# EAGLE board MCPGrundplatte (EAGLE 9.6.2)
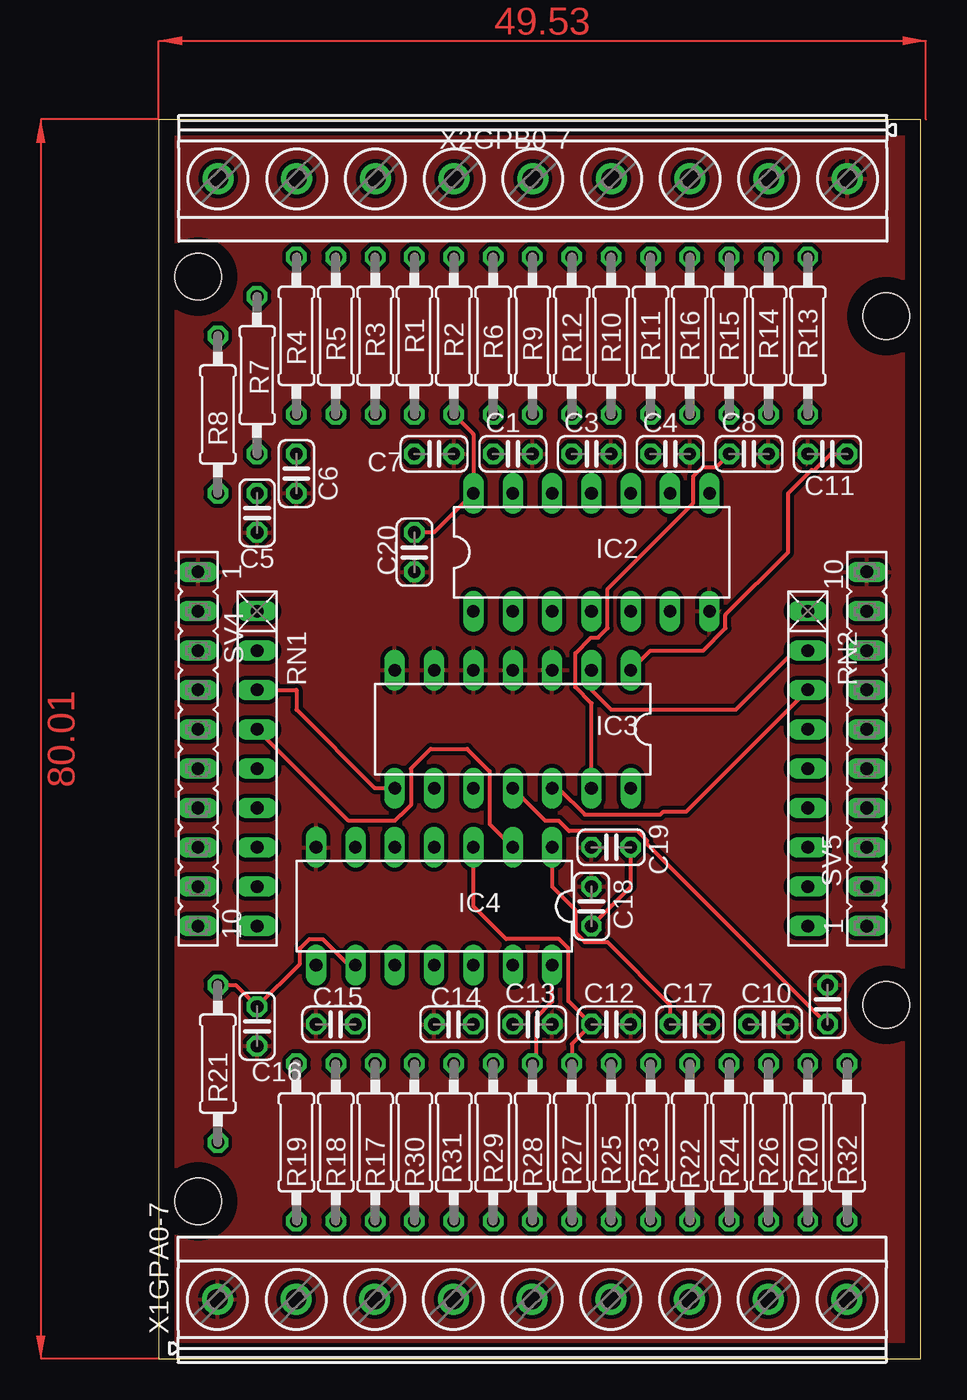
[diagram p0: board, top side]
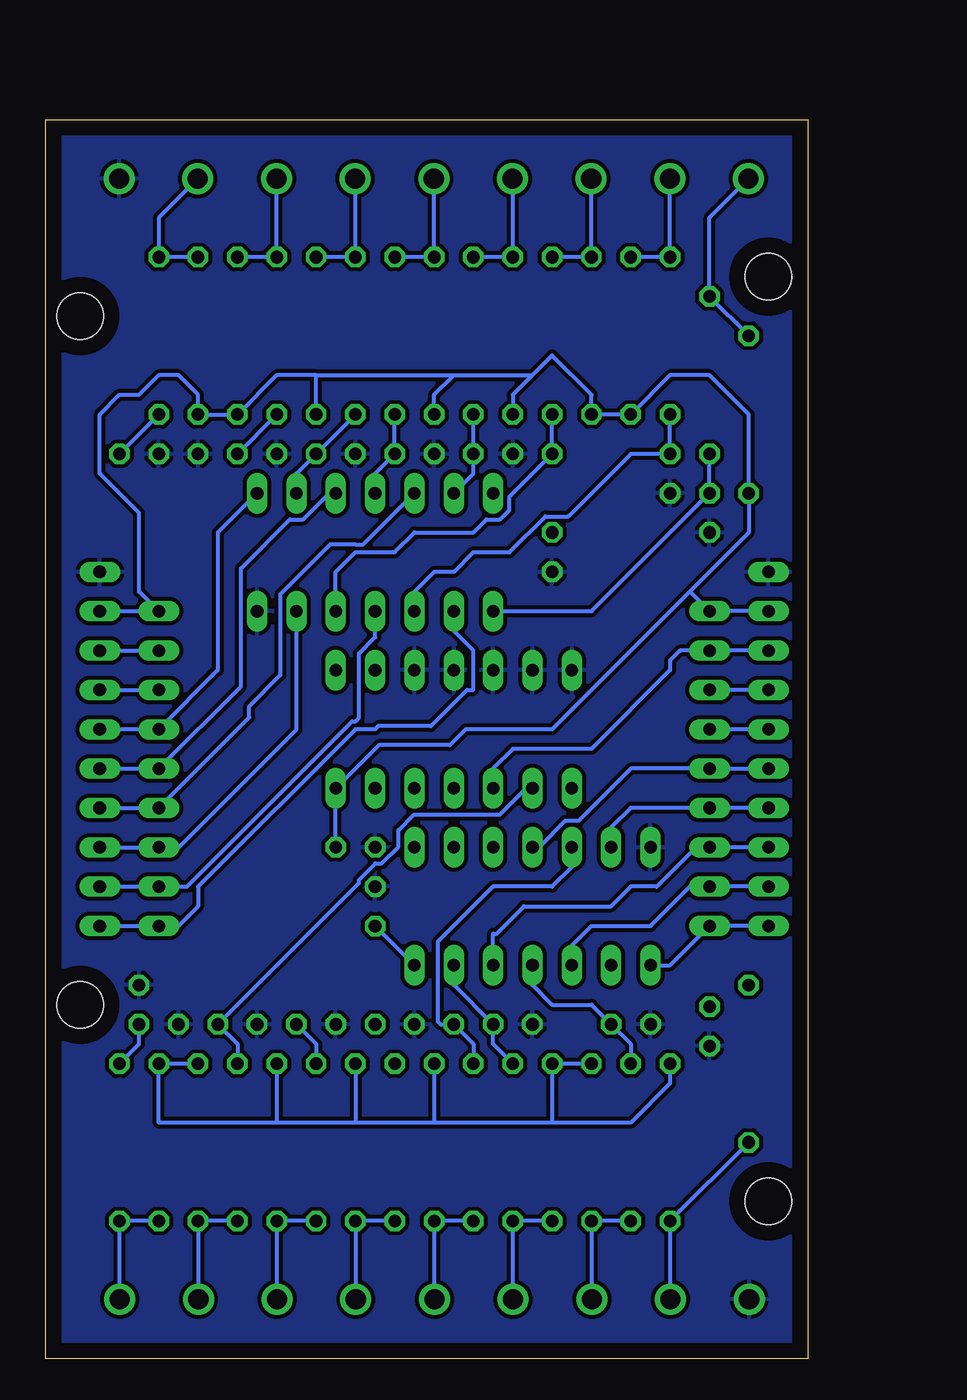
[diagram p1: board, bottom side, seen from below]

Size 49.2 x 80 mm. Coordinates in mm from the lower left corner, seen from the top.
Outline: 0,0 49.2,0 49.2,80 0,80 0,0
Copper layers (1*16): Top 0.035mm / dielectric 1.5mm / Bottom 0.035mm
Design rules "platinenbelichter": minimum track width 10mil, minimum drill 24mil, track to track 10mil, track to pad 10mil, pad to pad 10mil, via to via 10mil, smd to smd 10mil, copper to edge 40mil, drill to drill 8mil, minimum pad ring 10mil, minimum via ring 8mil, stop-mask expansion 10mil, vias tented up to drill 0mil, thermal gap 10mil
Holes 3 mm at 2.54,69.85 46.99,22.86 2.54,10.16 46.99,67.31

## Footprints (pad centres in the part's own frame; a part is rotated, then mirrored left to right if it is on the bottom)
C025-024X044 = drill 0.813 octagon: 1 -1.27,0; 2 1.27,0
DIL14 = drill 0.813 long: 1 -7.62,-3.81; 2 -5.08,-3.81; 3 -2.54,-3.81; 4 0,-3.81; 5 2.54,-3.81; 6 5.08,-3.81; 7 7.62,-3.81; 8 7.62,3.81; 9 5.08,3.81; 10 2.54,3.81; 11 0,3.81; 12 -2.54,3.81; 13 -5.08,3.81; 14 -7.62,3.81
0207/10 = drill 0.813 octagon: 1 -5.08,0; 2 5.08,0
RN-9 = drill 0.813 long: 1 -10.16,0; 2 -7.62,0; 3 -5.08,0; 4 -2.54,0; 5 0,0; 6 2.54,0; 7 5.08,0; 8 7.62,0; 9 10.16,0
FE10 = drill 0.813 long: 1 -11.43,0; 2 -8.89,0; 3 -6.35,0; 4 -3.81,0; 5 -1.27,0; 6 1.27,0; 7 3.81,0; 8 6.35,0; 9 8.89,0; 10 11.43,0
MKDSN1,5/9-5,08 = drill 1.3 pad 2: 1 -20.341,0.025; 2 -15.261,0.025; 3 -10.181,0.025; 4 -5.101,0.025; 5 -0.021,0.025; 6 5.059,0.025; 7 10.139,0.025; 8 15.219,0.025; 9 20.299,0.025

## Placement (x,y rotation side)
C1  100Nf  [C025-024X044]  22.86,58.42 0 top
C3  100nF  [C025-024X044]  27.94,58.42 0 top
C4  100nF  [C025-024X044]  33.02,58.42 0 top
C5  100nF  [C025-024X044]  6.35,54.61 270 top
C6  100nF  [C025-024X044]  8.89,57.15 270 top
C7  100nF  [C025-024X044]  17.78,58.42 0 top
C8  100nF  [C025-024X044]  38.1,58.42 0 top
C10  100nF  [C025-024X044]  39.37,21.59 0 top
C11  100nF  [C025-024X044]  43.18,58.42 180 top
C12  100nF  [C025-024X044]  29.21,21.59 0 top
C13  100nF  [C025-024X044]  24.13,21.59 0 top
C14  100nF  [C025-024X044]  19.05,21.59 180 top
C15  100nF  [C025-024X044]  11.43,21.59 180 top
C16  100nF  [C025-024X044]  6.35,21.46 270 top
C17  100nF  [C025-024X044]  34.29,21.59 0 top
C18  100nF  [C025-024X044]  27.94,29.21 270 top
C19  100nF  [C025-024X044]  29.21,33.02 0 top
C20  100nF  [C025-024X044]  16.51,52.07 270 top
C21  100nF  [C025-024X044]  43.18,22.86 90 top
IC2  74HC14N  [DIL14]  27.94,52.07 0 top
IC3  74HC14N  [DIL14]  22.86,40.64 180 top
IC4  74HC14N  [DIL14]  17.78,29.21 180 top
R1  10k  [0207/10]  16.51,66.04 270 top
R2  10k  [0207/10]  19.05,66.04 90 top
R3  10k  [0207/10]  13.97,66.04 90 top
R4  10k  [0207/10]  8.89,66.04 270 top
R5  10k  [0207/10]  11.43,66.04 270 top
R6  10k  [0207/10]  21.59,66.04 270 top
R7  10k  [0207/10]  6.35,63.5 270 top
R8  10k  [0207/10]  3.81,60.96 90 top
R9  10k  [0207/10]  24.13,66.04 90 top
R10  10k  [0207/10]  29.21,66.04 270 top
R11  10k  [0207/10]  31.75,66.04 90 top
R12  10k  [0207/10]  26.67,66.04 270 top
R13  10k  [0207/10]  41.91,66.04 270 top
R14  10k  [0207/10]  39.37,66.04 90 top
R15  10k  [0207/10]  36.83,66.04 90 top
R16  10k  [0207/10]  34.29,66.04 270 top
R17  10k  [0207/10]  13.97,13.97 270 top
R18  10k  [0207/10]  11.43,13.97 90 top
R19  10k  [0207/10]  8.89,13.97 270 top
R20  10k  [0207/10]  41.91,13.97 270 top
R21  10k  [0207/10]  3.81,19.05 90 top
R22  10k  [0207/10]  34.29,13.97 270 top
R23  10k  [0207/10]  31.75,13.97 90 top
R24  10k  [0207/10]  36.83,13.97 90 top
R25  10k  [0207/10]  29.21,13.97 270 top
R26  10k  [0207/10]  39.37,13.97 270 top
R27  10k  [0207/10]  26.67,13.97 90 top
R28  10k  [0207/10]  24.13,13.97 270 top
R29  10k  [0207/10]  21.59,13.97 90 top
R30  10k  [0207/10]  16.51,13.97 270 top
R31  10k  [0207/10]  19.05,13.97 90 top
R32  10k  [0207/10]  44.45,13.97 90 top
RN1  100K  [RN-9]  6.35,38.1 270 top
RN2  100K  [RN-9]  41.91,38.1 270 top
SV4  [FE10]  2.54,39.37 270 top
SV5  [FE10]  45.72,39.37 90 top
X1GPA0-7  MKDSN1,5/9-5,08  [MKDSN1,5/9-5,08]  24.13,3.81 0 top
X2GPB0-7  MKDSN1,5/9-5,08  [MKDSN1,5/9-5,08]  24.13,76.2 180 top

## Library data of the parts
C1 C3-C8 C10-C21 = rcl; SPICEPREFIX: C
IC2-IC4 = 74xx-eu
R1-R32 = rcl; SPICEPREFIX: R
RN1 = resistor-net; OC_FARNELL: unknown; OC_NEWARK: unknown; SPICEPREFIX: X
RN2 = resistor-net; OC_FARNELL: unknown; OC_NEWARK: unknown
SV4 SV5 = con-lsta; OC_FARNELL: unknown; OC_NEWARK: unknown
X1GPA0-7 X2GPB0-7 = con-phoenix-508

## Nets
GND: C1.2 C3.2 C4.2 C5.2 C6.2 C7.2 C8.2 C10.2 C11.2 C12.2 C13.2 C14.2 C15.2 C16.2 C17.2 C18.1 C19.1 C20.2 C21.2 IC2.7 IC3.3 IC3.4 IC3.5 IC3.6 IC3.7 IC4.7 SV4.1 SV5.10 X1GPA0-7.1 X2GPB0-7.1
GPA0: R20.2 R32.1 X1GPA0-7.9
GPA0.: IC3.10 RN1.2 SV4.3
GPA1: R24.1 R26.2 X1GPA0-7.8
GPA1.: IC3.8 RN1.3 SV4.4
GPA2: R22.2 R23.1 X1GPA0-7.7
GPA2.: IC4.2 RN1.4 SV4.5
GPA3: R25.2 R27.1 X1GPA0-7.6
GPA3.: IC4.4 RN1.5 SV4.6
GPA4: R28.2 R29.1 X1GPA0-7.5
GPA4.: IC4.6 RN1.6 SV4.7
GPA5: R30.2 R31.1 X1GPA0-7.4
GPA5.: IC4.12 RN1.7 SV4.8
GPA6: R17.2 R18.1 X1GPA0-7.3
GPA6.: IC4.10 RN1.8 SV4.9
GPA7: R19.2 R21.1 X1GPA0-7.2
GPA7.: IC4.8 RN1.9 SV4.10
GPB0: R7.1 R8.2 X2GPB0-7.9
GPB0.: IC2.2 RN2.9 SV5.1
GPB1: R4.1 R5.1 X2GPB0-7.8
GPB1.: IC2.4 RN2.8 SV5.2
GPB2: R1.1 R3.2 X2GPB0-7.7
GPB2.: IC2.6 RN2.7 SV5.3
GPB3: R2.2 R6.1 X2GPB0-7.6
GPB3.: IC2.12 RN2.6 SV5.4
GPB4: R9.2 R12.1 X2GPB0-7.5
GPB4.: IC2.10 RN2.5 SV5.5
GPB5: R10.1 R11.2 X2GPB0-7.4
GPB5.: IC2.8 RN2.4 SV5.6
GPB6: R15.2 R16.1 X2GPB0-7.3
GPB6.: IC3.12 RN2.3 SV5.7
GPB7: R13.1 R14.2 X2GPB0-7.2
GPB7.: IC3.2 RN2.2 SV5.8
N$2: C7.1 IC2.5 R1.2
N$4: C1.1 IC2.13 R6.2
N$5: C6.1 IC2.3 R4.2
N$6: C5.1 IC2.1 R7.2
N$7: C4.1 IC2.9 R10.2
N$8: C3.1 IC2.11 R12.2
N$9: C8.1 IC3.13 R16.2
N$10: C10.1 IC3.9 R24.2
N$11: C11.1 IC3.1 R13.2
N$12: C12.1 IC4.3 R27.2
N$13: C13.1 IC4.5 R29.2
N$16: C15.1 IC4.11 R18.2
N$20: C16.1 IC4.9 R21.2
N$21: C17.1 IC4.1 R23.2
N$28: C14.1 IC4.13 R31.2
N$52: C21.1 IC3.11 R32.2
VDD: C18.2 C19.2 C20.1 IC2.14 IC3.14 IC4.14 R2.1 R3.1 R5.2 R8.1 R9.1 R11.1 R14.1 R15.1 R17.1 R19.1 R20.1 R22.1 R25.1 R26.1 R28.1 R30.1 RN1.1 RN2.1 SV4.2 SV5.9

## Tracks (layer width: path | path; a pad name or v marks a point on that pad's centre or on a via)
GND
  pour Bottom: 0,80.01 49.53,80.01 49.53,0 0,0
  pour Top: 0,80.01 49.53,80.01 49.53,0 0,0
GPA0
  Bottom 0.254: R20.2 R32.1 44.45,3.86 X1GPA0-7.9
GPA0.
  Bottom 0.254: IC3.10 20.32,38.1 19.05,39.37 13.97,39.37 8.89,44.45 8.89,45.09 8.26,45.72 RN1.2 SV4.3
GPA1
  Bottom 0.254: R24.1 R26.2 39.37,3.86 X1GPA0-7.8
GPA1.
  Top 0.254: IC3.8 13.97,36.83 8.89,41.91 8.89,43.18 RN1.3
  Bottom 0.254: SV4.4 RN1.3
GPA2
  Bottom 0.254: R23.1 R22.2 34.29,3.86 X1GPA0-7.7
GPA2.
  Top 0.254: RN1.4 12.27,34.72 15.24,34.72 15.65,35.13 15.67,35.13 16.28,35.74 16.28,38.1 17.55,39.37 19.91,39.37 21.36,37.92 21.36,34.52 IC4.2
  Bottom 0.254: SV4.5 RN1.4
GPA3
  Bottom 0.254: R27.1 R25.2 29.21,3.86 X1GPA0-7.6
GPA3.
  Bottom 0.254: IC4.4 17.37,33.02 15.67,34.72 14.81,34.72 11.43,38.1 RN1.5 SV4.6
GPA4
  Bottom 0.254: R29.1 R28.2 24.13,3.86 X1GPA0-7.5
GPA4.
  Bottom 0.254: SV4.7 RN1.6 11.43,35.56 12.7,34.29 IC4.6
GPA5
  Bottom 0.254: X1GPA0-7.4 19.03,8.87 | R30.2 19.01,8.89 19.03,8.87 | R31.1 19.03,8.89 19.03,8.87
GPA5.
  Bottom 0.254: IC4.12 20.32,27.43 20.11,27.43 18.33,29.21 12.7,29.21 11.43,30.48 9.75,30.48 7.21,33.02 RN1.7 SV4.8
GPA6
  Bottom 0.254: R18.1 R17.2 13.97,3.86 X1GPA0-7.3
GPA6.
  Bottom 0.254: SV4.9 RN1.8 7.62,30.48 10.16,27.94 13.97,27.94 15.24,26.67 IC4.10
GPA7
  Bottom 0.254: R21.1 R19.2 8.89,3.86 X1GPA0-7.2
GPA7.
  Bottom 0.254: IC4.8 8.89,25.4 RN1.9 SV4.10
GPB0
  Bottom 0.254: X2GPB0-7.9 6.35,73.66 R7.1 R8.2
GPB0.
  Bottom 0.254: SV5.1 RN2.9 40.64,27.94 39.37,29.21 39.37,30.48 29.21,40.64 27.94,40.64 27.74,40.84 24.33,40.84 22,43.18 21.59,43.18 21.59,45.72 22.86,46.99 IC2.2
GPB1
  Bottom 0.254: X2GPB0-7.8 8.89,76.15 R4.1 R5.1
GPB1.
  Bottom 0.254: SV5.2 RN2.8 40.09,30.48 29.42,41.15 29.21,41.15 28.98,41.38 28.98,45.54 27.94,46.58 IC2.4
GPB2
  Bottom 0.254: X2GPB0-7.7 13.97,76.15 R3.2 R1.1
GPB2.
  Bottom 0.254: SV5.3 RN2.7 40.64,33.02 33.02,40.64 IC2.6
GPB3
  Bottom 0.254: X2GPB0-7.6 19.05,76.15 R2.2 R6.1
GPB3.
  Bottom 0.254: SV5.4 RN2.6 36.07,41.4 36.07,42.12 34.06,44.13 34.06,49.35 30.84,52.58 29.21,52.58 28.7,52.58 IC2.12
GPB4
  Bottom 0.254: X2GPB0-7.5 24.13,76.15 R9.2 R12.1
GPB4.
  Bottom 0.254: SV5.5 RN2.5 36.6,43.41 36.6,51.03 33.45,54.18 32.59,54.18 30.89,55.88 IC2.10
GPB5
  Bottom 0.254: R11.2 R10.1 29.21,76.15 X2GPB0-7.4
GPB5.
  Bottom 0.254: IC2.8 38.1,53.34 38.1,44.45 RN2.4 SV5.6
GPB6
  Bottom 0.254: R15.2 R16.1 34.29,76.15 X2GPB0-7.3
GPB6.
  Top 0.254: IC3.12 25.81,36.83 27.51,35.13 32.38,35.13 32.59,35.33 34.06,35.33 RN2.3
  Bottom 0.254: SV5.7 RN2.3
GPB7
  Bottom 0.254: R14.2 R13.1 41.91,73.66 X2GPB0-7.2
GPB7.
  Top 0.254: RN2.2 41.07,45.72 37.26,41.91 29.21,41.91 27.94,43.18 IC3.2
  Bottom 0.254: SV5.8 RN2.2
N$2
  Bottom 0.254: IC2.5 30.48,50.8 29.21,52.07 26.67,52.07 25.4,53.34 21.59,53.34 20.75,54.18 19.89,54.18 19.28,54.79 19.28,55.65 C7.1 R1.2
N$4
  Bottom 0.254: IC2.13 21.59,57.15 C1.1 R6.2
N$5
  Bottom 0.254: IC2.3 25.4,49.53 24.13,50.8 22.86,50.8 21.59,52.07 19.25,52.07 16.94,54.38 15.47,54.38 11.43,58.42 C6.1 R4.2
N$6
  Bottom 0.254: IC2.1 15.24,48.26 15.04,48.26 13.97,48.26 C5.1 R7.2
N$7
  Bottom 0.254: R10.2 C4.1 33.02,57.15 IC2.9
N$8
  Bottom 0.254: R12.2 C3.1 27.94,57.15 IC2.11
N$9
  Top 0.254: C8.1 35.99,57.58 35.13,57.58 34.52,56.97 34.52,55.24 28.98,49.71 28.98,47.17 28.37,46.56 27.91,46.56 26.9,45.54 26.9,43.36 27.94,42.32 IC3.13
  Bottom 0.254: C8.1 R16.2
N$10
  Bottom 0.254: R24.2 36.83,20.32 C10.1 28.98,30.71 28.98,30.91 27.91,31.98 27.51,31.98 26.44,33.05 26.44,34.11 25.43,35.13 19.89,35.13 18.19,36.83 IC3.9
N$11
  Top 0.254: IC3.1 31.75,45.72 35.15,45.72 36.6,47.17 36.6,48.03 40.64,52.07 40.64,55.88 42.14,57.38 42.34,57.38 43.38,58.42 C11.1
  Bottom 0.254: C11.1 R13.2
N$12
  Top 0.254: IC4.3 20.32,29.21 22.43,27.1 25.83,27.1 26.44,26.49 26.44,23.09 C12.1 26.67,20.32 R27.2
N$13
  Bottom 0.254: R29.2 21.59,20.32 C13.1 23.72,21.59 23.9,21.77 23.9,26.9 20.32,30.48 16.51,30.48 15.24,31.75 IC4.5
N$16
  Bottom 0.254: R18.2 11.43,20.32 C15.1 13.97,22.86 16.51,22.86 17.78,24.13 IC4.11
N$20
  Top 0.254: R21.2 4.95,24.13 C16.1 9.12,25.5 9.12,26.49 9.73,27.1 10.59,27.1 12.29,25.4 IC4.9
N$21
  Top 0.254: IC4.1 25.4,30.48 26.9,28.98 26.9,27.51 27.51,26.9 28.98,26.9 33.02,22.86 C17.1
  Bottom 0.254: R23.2 31.75,20.32 C17.1
N$28
  Bottom 0.254: R31.2 20.32,20.32 C14.1 22.86,24.13 IC4.13
N$52
  Top 0.254: C21.1 31.52,33.25 31.52,33.45 30.91,34.06 26.49,34.06 25.83,34.72 24.97,34.72 IC3.11
  Bottom 0.254: R32.2 43.18,20.32 C21.1
VDD
  Top 0.254: R2.1 20.32,59.69 IC2.14 17.78,53.34 C20.1 | R28.1 24.36,19.28 24.36,22.02 25.4,23.06 IC4.14 | C18.2 30.48,30.48 C19.2
  Bottom 0.254: SV5.9 RN2.1 43.18,49.53 43.18,54.61 45.72,57.15 45.72,60.96 44.45,62.23 43.18,62.23 41.91,63.5 40.64,63.5 39.37,62.23 R14.1 R15.1 34.29,63.5 31.75,63.5 | 17.78,63.5 16.51,64.77 13.97,62.23 R3.1 R5.2 8.89,63.5 6.35,63.5 3.81,60.96 R8.1 3.81,53.34 7.62,49.53 | 17.78,63.5 19.05,62.23 R2.1 | R9.1 24.13,62.23 22.86,63.5 | 22.86,63.5 17.78,63.5 | R11.1 31.75,63.5 | 31.75,63.5 22.86,63.5 | R19.1 8.89,17.78 11.43,15.24 16.51,15.24 | 16.51,15.24 24.13,15.24 | 24.13,15.24 29.21,15.24 | 29.21,15.24 34.29,15.24 | 34.29,15.24 41.91,15.24 R20.1 R26.1 | 16.51,15.24 R30.1 R17.1 | R28.1 24.13,15.24 | R25.1 29.21,15.24 | R22.1 34.29,15.24 | C19.2 IC3.14 27.69,39.62 23.11,39.62 22.1,40.64 16.51,40.64 7.62,49.53 | IC4.14 C18.2 | SV4.2 RN1.1 7.62,49.53
(copper drawn outside any net)
  shapes: Top area x2

## Text on the board
tDocu: SX2MCP23017 / INPUT / Version V5